# Altium PCB Power.PcbDoc
Units mm, origin at the board's own origin, x right, y up, seen from the top; angles counter-clockwise.
Board outline 70.25 x 40.64 mm, 2 copper layers (Top Layer, Bottom Layer), stack 0.533 mm thick; 68 components, 55 nets, 253 pads, 554 vias.
Unrouted connection lines stored in the file: 53.
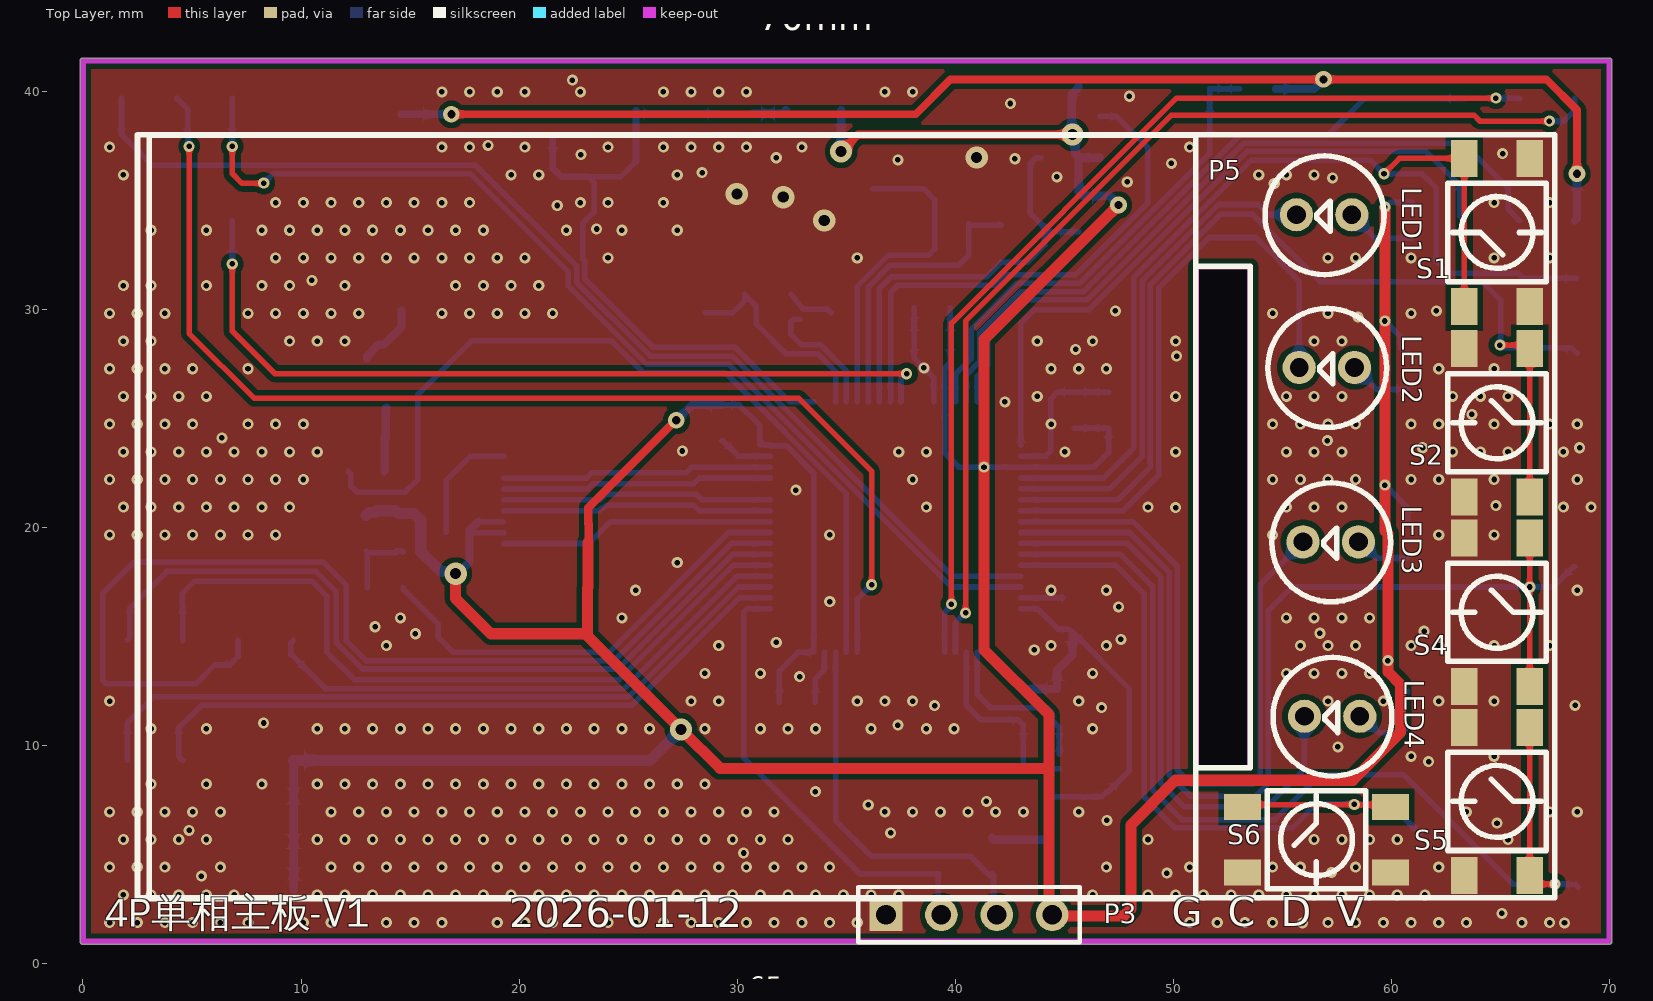
[diagram p0: Top Layer view]
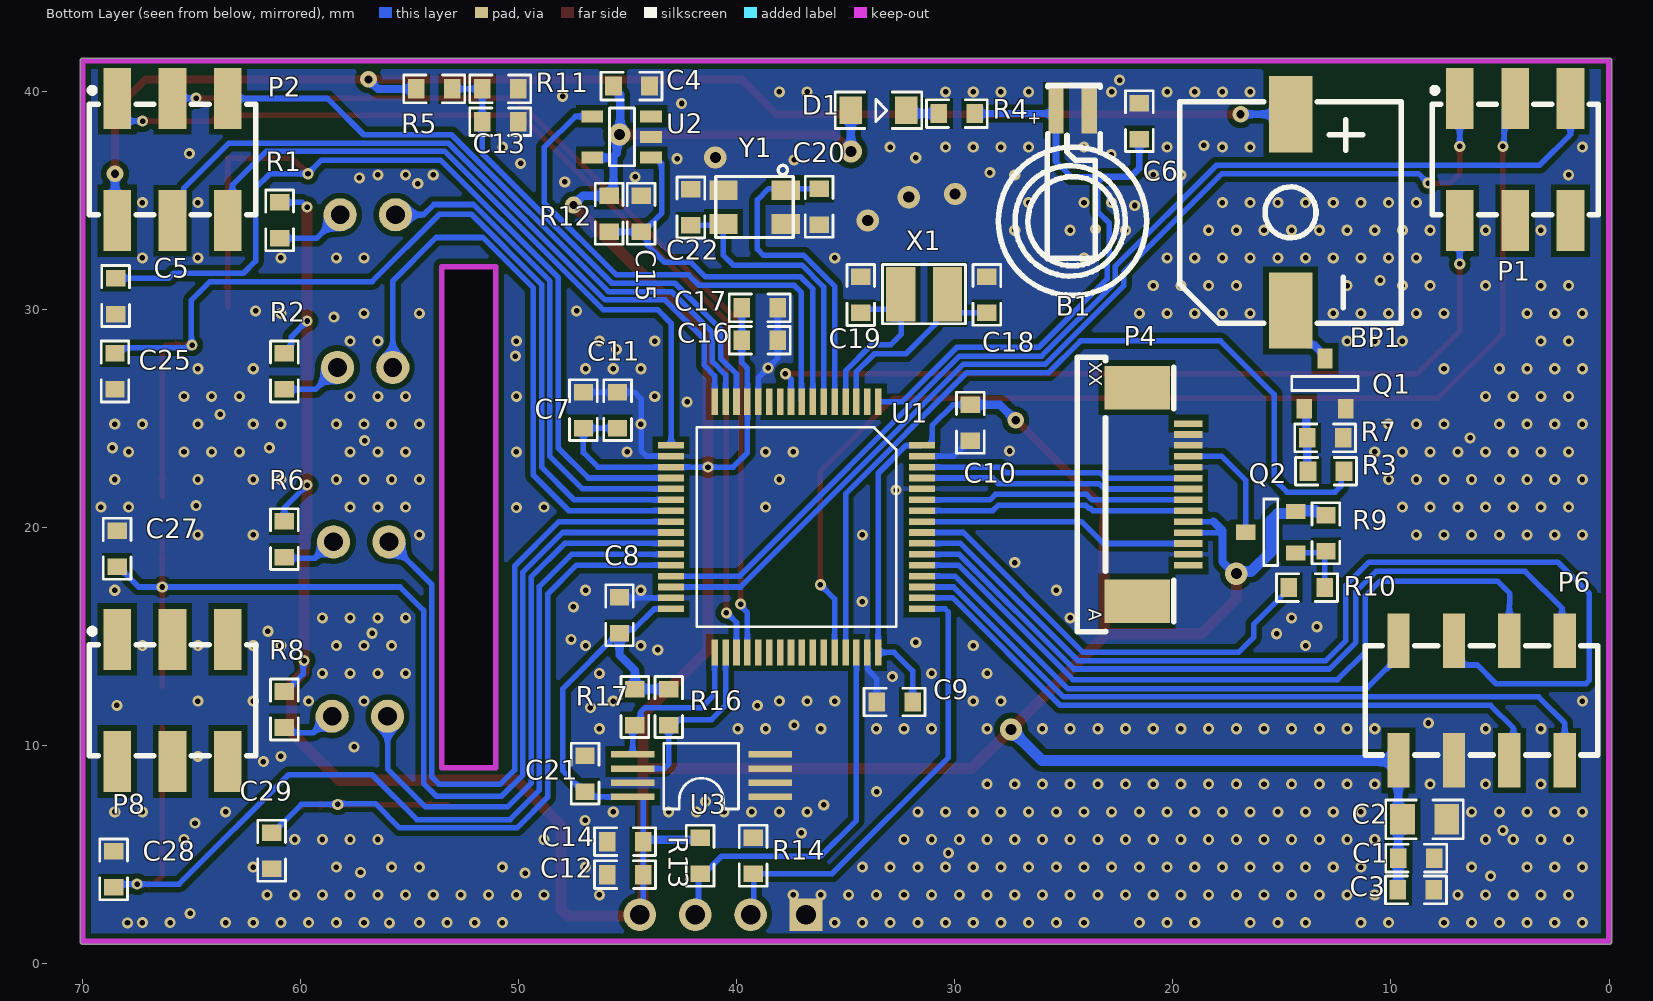
[diagram p1: Bottom Layer view, seen from below]

## Layer stack, top to bottom
Top Solder: solder mask 0.0102, Solder Resist, Dk 3.5
Top Layer: signal copper 0.0356
Dielectric 2: prepreg 0.0711, Composite dielectric, Dk 4.1
Dielectric 1: prepreg 0.32, Composite dielectric, Dk 4.1
Dielectric 3: prepreg 0.0711, Composite dielectric, Dk 4.1
Bottom Layer: signal copper 0.0356
Bottom Solder: solder mask 0.0102, Solder Resist, Dk 3.5

## Board outline
-0.127,1 -0.127,41.348 cw(c-0.007,41.389) -0.007,41.517 69.993,41.517 cw(c69.993,41.389) 70.12,41.389 70.12,1 cw(c69.993,1) 69.99,0.873 cw(c69.986,1) 69.986,0.873 0,0.873 cw(c0,1)
cut-out: 51.051,8.97 51.051,31.953 53.54,31.953 53.54,8.97

## Design rules (kind name [scope] priority, off if disabled: settings)
Clearance "Via to pad" [IsVia vs IsPad] p1: gap=0.254 ignorepadtopadclearanceinfootprint=FALSE
Clearance Ploy [InPoly] p2: gap=0.254 ignorepadtopadclearanceinfootprint=FALSE
Clearance "Track to pad" [IsTrack vs IsPad] p3: gap=0.203 ignorepadtopadclearanceinfootprint=FALSE
Clearance "Track to track" [IsTrack vs IsTrack] p4: gap=0.127 ignorepadtopadclearanceinfootprint=FALSE
Clearance "Via to Track" [IsVia vs IsTrack] p5: gap=0.254 ignorepadtopadclearanceinfootprint=FALSE
Clearance "Via To Via" [IsVia vs IsVia] p6: gap=0.254 ignorepadtopadclearanceinfootprint=FALSE
ComponentClearance [All] p1: gap=0 collisioncheckmode=3 verticalgap=0 showdistances=FALSE
DiffPairsRouting [All] p1: maxlimit=0.254 minlimit=0.178 mostfreqgap=0.178 toplayer_minwidth=0.127 toplayer_maxwidth=2.54 toplayer_prefwidth=0.178 bottomlayer_minwidth=0.127 bottomlayer_maxwidth=2.54 bottomlayer_prefwidth=0.178 maxuncoupledlength=12.7
HoleSize [All] p1: absolutevalues=TRUE maxlimit=5.08 minlimit=0.025 maxpercent=80.000 minpercent=20.000
HoleToHoleClearance [All] p1: gap=0.127 allowstackedmicrovias=TRUE
MinimumSolderMaskSliver [All] p1: minsoldermaskwidth=0
PolygonConnect [All vs (InPadClass('All Pads'))] p1: connectstyle=Direct reliefconductorwidth=0.254 reliefentries=4 polygonreliefangle="90 Angle" airgapwidth=0.254
PolygonConnect GND焊盘 [InNet('GND_1') vs (InPadClass('All Pads'))] p2: connectstyle=Relief reliefconductorwidth=0.254 reliefentries=4 polygonreliefangle="90 Angle" airgapwidth=0.254
PolygonConnect GND过孔 [All vs IsVia] p3: connectstyle=Direct reliefconductorwidth=0.254 reliefentries=4 polygonreliefangle="90 Angle" airgapwidth=0.254
RoutingVias RoutingVias_1 [InNet('AGND_1')] p1: holewidth=0.254 width=0.508 viastyle="Through Hole" minholewidth=0.254 minwidth=0.508 maxholewidth=0.711 maxwidth=1.27
RoutingVias [All] p2: holewidth=0.254 width=0.508 viastyle="Through Hole" minholewidth=0.254 minwidth=0.508 maxholewidth=0.711 maxwidth=1.27
SilkToSilkClearance [All] p1: silktosilkclearance=0
SilkToSolderMaskClearance [IsPad] p1: minsilkscreentomaskgap=0 clearancetoexposedcopper=TRUE
SolderMaskExpansion [All] p1: expansion=0.025 istentingtop=FALSE
Width [All] p1: maxlimit=7.62 minlimit=0.127 preferedwidth=0.178 minimp=50.000000 maximp=50.000000 favimp=50.000000
23 further rules are at their usual default settings.

## Classes and differential pairs
component class Sheet1: BP1 C5 C25 C27 C28 C29 LED1 LED2 LED3 LED4 P4 P5 Q1 Q2 R1 R2 R3 R6 R7 R8 R9 R10 S1 S2 S4 S5 S6
component class MCU: B1 C4 C6 C7 C8 C9 C10 C11 C12 C13 C14 C15 C16 C17 C18 C19 C20 C21 C22 D1 P3 R4 R5 R11 R12 R13 R14 R16 R17 U1 U2 U3 X1 Y1
component class 连接: C1 C2 C3 P1 P2 P6 P8

## Components (designator, comment, footprint, x,y, rotation, side; value= is the part's Value field where it differs from the comment)
B1 "MS621" MS621 34.611,-30.023 r90 bottom
BP1 "BEEP" XHXDZ-SMD9650 14.605,38.938 r90 bottom
C1 "10uF/25V" 0603R 8.014,4.823 r0 bottom
C2 "22uF/10V" 0805R 9.474,6.604 r180 bottom
C3 "104/10V" 0603R 8.029,3.368 r0 bottom
C4 "104" 0603R 44.006,40.234 r0 bottom
C5 "104" 0603R 68.491,31.426 r270 bottom
C6 "0.1uF/10V/0603" 0603R 21.54,39.45 r270 bottom
C7 "0.1uF" 0603R 47.033,26.195 r270 bottom
C8 "0.1uF" 0603R 45.381,16.787 r270 bottom
C9 "0.1uF" 0603R 33.59,11.985 r180 bottom
C10 "0.1uF" 0603R 29.287,23.964 r90 bottom
C11 "4.7uF/10V/0603" 0603R 45.47,26.195 r270 bottom
C12 "10nF/10V/0603" 0603R 45.95,4.07 r180 bottom
C13 "104" 0603R 50.023,38.597 r0 bottom
C14 "1uF/10V/0603" 0603R 45.95,5.578 r180 bottom
C15 "0.1uF/10V/0603" 0603R 44.387,35.198 r270 bottom
C16 "10nF/10V/0603" 0603R 38.12,28.574 r0 bottom
C17 "1uF/10V/0603" 0603R 38.12,30.057 r0 bottom
C18 "10pF" 0603r 28.531,29.829 r90 bottom
C19 "10pF" 0603r 34.316,31.478 r270 bottom
C20 "20pF" 0603r 36.225,33.874 r90 bottom
C21 "0.1uF" 0603R 46.961,9.523 r270 bottom
C22 "20pF" 0603r 42.105,35.492 r270 bottom
C25 "104" 0603R 68.517,27.97 r270 bottom
C27 "104" 0603R 68.42,18.185 r90 bottom
C28 "104" 0603R 68.579,3.482 r90 bottom
C29 "104" 0603R 61.335,5.985 r270 bottom
D1 "SS14" SOD323 32.233,39.12 r180 bottom
LED1 "LED" LED 56.921,34.33 r180 top locked
LED2 "LED" Led 57.049,27.33 r180 top
LED3 "LED" led 57.223,19.33 r180 top
LED4 "LED" led 57.286,11.33 r180 top
P1 "Header 3X2" CONN-SMD_5BME8-08872-203-W0 4.306,36.862 r180 bottom locked
P2 "Header 3X2" CONN-SMD_5BME8-08872-203-W0 65.88,36.862 r180 bottom locked
P3 "Header 4" HDR1X4 36.829,2.23 r0 top
P4 "Header 14" 0.5mm间距FPC排座上接14pin 20.467,21.503 r270 bottom
P5 "TFT 2.0" 2.0寸TFT彩屏 51.042,37.967 r180 top locked
P6 "Header 4X2" CONN-SMD_5BME8-08872-204-W0 5.84,12.054 r180 bottom locked
P8 "Header 3X2" CONN-SMD_5BME8-08872-203-W0 65.88,12.054 r180 bottom locked
Q1 "S8050" SOT-23 13.975,25.44 r180 bottom
Q2 "AO3401" SOT-23 14.366,18.819 r90 bottom
R1 "Res2" 0603R 60.971,34.897 r270 bottom value=1K
R2 "Res2" 0603R 60.747,27.971 r270 bottom value=1K
R3 "4.7K/5%" 0603R 12.156,22.567 r0 bottom
R4 "470R/5%" 0603R 29.083,38.972 r0 bottom
R5 "9K/1%/0603" 0603R 54.703,40.101 r180 bottom
R6 "Res2" 0603R 60.747,20.28 r270 bottom value=1K
R7 "47K/5%" 0603R 13.843,24.101 r180 bottom
R8 "Res2" 0603R 60.747,12.466 r270 bottom value=1K
R9 "47K/5%/0603" 0603R 12.981,18.895 r90 bottom
R10 "4.7K/5%/0603" 0603R 13.028,17.235 r0 bottom
R11 "3K/1%/0603" 0603R 50.023,40.101 r0 bottom
R12 "10K/5%/0603" 0603r 45.854,33.547 r90 bottom
R13 "10K/5%/0603" 0603r 41.686,4.108 r90 bottom
R14 "10K/5%/0603" 0603r 39.251,5.759 r270 bottom
R16 "4.7K/5%/0603" 0603R 43.121,12.577 r270 bottom
R17 "4.7K/5%/0603" 0603R 44.673,12.577 r270 bottom
S1 "SW2" 4.5*4.5贴片4脚独立按键 64.849,33.517 r270 top
S2 "SW2" 4.5*4.5贴片4脚独立按键 64.849,24.788 r90 top
S4 "SW2" 4.5*4.5贴片4脚独立按键 64.849,16.097 r90 top
S5 "SW2" 4.5*4.5贴片4脚独立按键 64.849,7.423 r90 top
S6 "SW2" 4.5*4.5贴片4脚独立按键 56.569,5.671 r180 top
U1 "*" LQFP64 33.515,25.758 r270 bottom
U2 "CAT823ZTDI-GT3" SOT-23-5 43.93,36.946 r90 bottom
U3 "BL24C16A-SFRC" TSSOP8 38.476,7.631 r0 bottom
X1 "32.768K" Y3215 31.414,30.678 r180 bottom
Y1 "8MHz无源" 3225 39.189,34.684 r180 bottom

## Footprints (in the part's own frame and the unit in brackets; to place one, negate y for a bottom-side part, rotate by r counter-clockwise, add the part's x,y. Pads: shape width x height; smd on the part's side, far side on the other; paste and mask are expansions set on the pad)
0.5mm间距FPC排座上接14pin [mm]
  rect 0.3x1.3 smd paste+0.051: 1(-3.25,1.175) 2(-2.75,1.175) 3(-2.25,1.175) 4(-1.75,1.175) 5(-1.25,1.175) 6(-0.75,1.175) 7(-0.25,1.175) 8(0.25,1.175) 9(0.75,1.175) 10(1.25,1.175) 11(1.75,1.175) 12(2.25,1.175) 13(2.75,1.175) 14(3.25,1.175)
  rect 2x3 smd paste+0.051: 15(4.9,-1.175) 16(-4.9,-1.175)
  silkscreen extent -6.3,-3.92 6.3,0.51
2.0寸TFT彩屏 [mm]
  Keep-Out Layer lines w0.254: -0.009,28.997 -2.499,28.997 -2.499,6.014 -0.009,6.014 -0.009,28.997
  silkscreen extent -2.5,0 48,35
4.5*4.5贴片4脚独立按键 [mm]
  rect 1.7x1.2 smd: 1(-3.4,-1.5) 1(3.4,-1.5) 2(-3.4,1.5) 2(3.4,1.5)
  silkscreen extent -2.25,-2.25 2.25,2.25
0603R [mil]
  rect 30x35 smd: 1(0,0) 2(65,0)
  silkscreen extent -22,-25 88,25
0603r [mil]
  rect 30x35 smd: 1(0,0) 2(65,0)
  silkscreen extent -22,-25 88,25
0805R [mil]
  rect 45x55 smd: 1(0,0) 2(80,0)
  silkscreen extent -30,-35 110,35
3225 [mm]
  rect 1.3x0.9 smd: 1(1.425,0.775) 2(-1.425,0.775) 3(-1.425,-0.775) 4(1.425,-0.775)
  silkscreen extent -1.78,-1.4 1.78,1.91, body extent -1.65,-1.3 1.55,1.2, height 0.61
CONN-SMD_5BME8-08872-203-W0 [mm]
  rect 1.27x2.8 smd paste+0.051: 1(-2.54,2.8) 2(-2.54,-2.8) 3(0,2.8) 4(0,-2.8) 5(2.54,2.8) 6(2.54,-2.8)
  silkscreen extent -3.81,-2.54 3.81,3.3
CONN-SMD_5BME8-08872-204-W0 [mm]
  rect 1.02x2.5 smd paste+0 mask+0.05: 1(-3.81,2.75) 2(-3.81,-2.75) 3(-1.27,2.75) 4(-1.27,-2.75) 5(1.27,2.75) 6(1.27,-2.75) 7(3.81,2.75) 8(3.81,-2.75)
  silkscreen extent -5.33,-2.5 5.33,2.5
HDR1X4 [mm] "Connector; Header; 4 Position"
  rect 1.5x1.5 hole 0.9: 1(0,0)
  round 1.5 hole 0.9: 2(2.54,0) 3(5.08,0) 4(7.62,0)
  silkscreen extent -1.27,-1.27 8.89,1.27
LED [mil]
  round 60 hole 34: 1(-50,0) 2(50,0)
  silkscreen extent -108,-106 107,108
Led [mil]
  round 60 hole 34: 1(-50,0) 2(50,0)
  silkscreen extent -108,-106 107,108
led [mil]
  round 60 hole 34: 1(-50,0) 2(50,0)
  silkscreen extent -108,-106 107,108
LQFP64 [mm]
  rect 1.2x0.3 smd: 1(0,0) 2(0,-0.5) 3(0,-1) 4(0,-1.5) 5(0,-2) 6(0,-2.5) 7(0,-3) 8(0,-3.5) 9(0,-4) 10(0,-4.5) 11(0,-5) 12(0,-5.5) 13(0,-6) 14(0,-6.5) 15(0,-7) 16(0,-7.5) 33(11.5,-7.5) 34(11.5,-7) 35(11.5,-6.5) 36(11.5,-6) 37(11.5,-5.5) 38(11.5,-5) 39(11.5,-4.5) 40(11.5,-4) 41(11.5,-3.5) 42(11.5,-3) 43(11.5,-2.5) 44(11.5,-2) 45(11.5,-1.5) 46(11.5,-1) 47(11.5,-0.5) 48(11.5,0)
  rect 0.3x1.2 smd: 17(2,-9.5) 18(2.5,-9.5) 19(3,-9.5) 20(3.5,-9.5) 21(4,-9.5) 22(4.5,-9.5) 23(5,-9.5) 24(5.5,-9.5) 25(6,-9.5) 26(6.5,-9.5) 27(7,-9.5) 28(7.5,-9.5) 29(8,-9.5) 30(8.5,-9.5) 31(9,-9.5) 32(9.5,-9.5) 49(9.5,2) 50(9,2) 51(8.5,2) 52(8,2) 53(7.5,2) 54(7,2) 55(6.5,2) 56(6,2) 57(5.5,2) 58(5,2) 59(4.5,2) 60(4,2) 61(3.5,2) 62(3,2) 63(2.5,2) 64(2,2)
  silkscreen extent 1.18,-8.32 10.32,0.82
MS621 [mm]
  rect 2.1x0.7 smd paste+0 mask+0.05: 1(69.139,-9.246) 2(69.139,-10.77)
  silkscreen extent 60.66,-13.41 70.28,-6.61
SOD323 [mil]
  rect 40x50 smd: 1(0,0) 2(-100,0)
  silkscreen extent -128,-33 28,33
SOT-23 [mm]
  rect 0.7x0.9 smd: 1(0,0) 2(1.9,0) 3(0.95,2.3)
  silkscreen extent -0.57,0.82 2.47,1.47
SOT-23-5 [mm]
  rect 0.55x1 smd: 1(0,0) 2(0.95,0) 3(1.9,0) 4(1.9,2.7) 5(0,2.7)
  silkscreen extent -0.37,0.76 2.29,1.91
TSSOP8 [mm]
  rect 2x0.3 smd: 1(0,0) 2(0,-0.65) 3(0,-1.3) 4(0,-1.95) 5(6.299,-1.95) 6(6.299,-1.3) 7(6.299,-0.65) 8(6.299,0)
  silkscreen extent 1.45,-2.46 4.88,0.56
XHXDZ-SMD9650 [mm]
  rect 3.5x2 smd: 1(0,0) 2(-9.001,0)
  silkscreen extent -9.58,-5.08 0.58,5.08
Y3215 [mm]
  rect 1.35x2.5 smd: 1(-1.075,0) 2(1.075,0)
  silkscreen extent -1.9,-1.35 1.9,1.37

## Part data
B1: library part BATTERY
C1 C4 C5 C13 C18 C19 C20 C22 C25 C27 C28 C29: library part CAP
C2: library part "Cap Pol1", "Polarized Capacitor (Radial)", LatestRevisionDate=17-Jul-2002, LatestRevisionNote="Re-released for DXP Platform.", PackageDescription="Polarized Capacitor (Radial); 2 Leads", PackageReference=RB7.6-15, Published=8-Jun-2000, Publisher="Altium Limited"
C3 C6 C7 C8 C9 C10 C11 C12 C14 C15 C16 C17 C21: library part CAP_1
D1: library part DIODE
P1 P2 P8: "Header, 3-Pin, Dual row", LatestRevisionDate=17-Jul-2002, LatestRevisionNote="Re-released for DXP Platform.", Publisher="Altium Limited"
P3: "Header, 4-Pin", LatestRevisionDate=17-Jul-2002, LatestRevisionNote="Re-released for DXP Platform.", Publisher="Altium Limited"
P4: "Header, 14-Pin", LatestRevisionDate=17-Jul-2002, LatestRevisionNote="Re-released for DXP Platform.", Publisher="Altium Limited"
P5: library part "Header 14", LatestRevisionDate=17-Jul-2002, LatestRevisionNote="Re-released for DXP Platform.", Publisher="Altium Limited"
P6: "Header, 4-Pin, Dual row", LatestRevisionDate=17-Jul-2002, LatestRevisionNote="Re-released for DXP Platform.", Publisher="Altium Limited"
Q1: library part NPN_1
Q2: library part PNP
R3 R7: library part Res2, "Resistor", LatestRevisionDate=17-Jul-2002, LatestRevisionNote="Re-released for DXP Platform.", PackageDescription="Axial Device, Thru-Hole; 2 Leads; 0.4 in Pin Spacing", PackageReference=AXIAL-0.4, Published=8-Jun-2000, Publisher="Altium Limited"
R4 R5 R9 R10 R11 R12 R13 R14 R16 R17: library part RES
U1: library part N32G452REL7, Symbol=N32G452REL7
U2: library part CAT823
U3: library part 24LC02
X1: library part XTAL
Y1: library part 12MHz无源
R1 R2 R6 R8: LatestRevisionDate=17-Jul-2002, LatestRevisionNote="Re-released for DXP Platform.", PackageDescription="Axial Device, Thru-Hole; 2 Leads; 0.4 in Pin Spacing", PackageReference=AXIAL-0.4, Published=8-Jun-2000, Publisher="Altium Limited"

## Via types
v1: diameter 0.508, hole 0.254, Top Layer to Bottom Layer, 541 vias
v2: diameter 1.016, hole 0.508, Top Layer to Bottom Layer, 8 vias
v3: diameter 0.762, hole 0.381, Top Layer to Bottom Layer, 5 vias

## Nets (pads, with @x,y where several pads share a name; then routed paths per layer and width w, separated by ;. In a path a pad name is that pad's centre, name@x,y a point inside that pad or via, vN(x,y) a via of type N, cw(c..) or ccw(c..) an arc to the next point about the centre after c; other vN are vias at no path point)
4G_MCU_RXD: P6.1 U1.52 | length 25.5
  Bottom Layer w0.254: P6.1 9.525,14.679 9.525,14.154 9.56,14.154 11.117,12.597 24.833,12.597 29.995,17.758 U1.52
4G_MCU_TXD: P6.8 U1.51 | length 33.8
  Bottom Layer w0.254: P6.8 2.03,11.021 3.224,12.216 25.014,12.216 30.057,17.258 U1.51
4G_Reset: P6.6 U1.50 | length 31.2
  Bottom Layer w0.254: P6.6 4.385,9.489 4.385,10.786 5.429,11.83 25.168,11.83 30.095,16.758 U1.50
BEEP: R3.1 U1.45 | length 38.9
  Bottom Layer w0.254: R3.1 12.285,22.438 12.285,21.891 12.565,21.611 14.777,21.611 15.355,22.189 15.355,26.09 17.812,28.547 24.238,28.547 25.702,27.083 29.464,27.083 35.015,21.532 U1.45
BL0942_MCU_RXD: P2.6 U1.17 | length 31.3
  Bottom Layer w0.254: U1.17 43.015,29.356 43.625,29.965 46.121,29.965 53.392,37.236 61.588,37.236 63.131,35.694 63.131,34.271 P2.6
BL0942_MCU_TXD: P2.4 U1.16 | length 33.2
  Bottom Layer w0.254: U1.16 41.015,26.945 41.504,27.433 41.504,28.642 43.287,30.426 46.042,30.426 53.234,37.617 63.295,37.617 65.372,35.541 65.372,34.57 P2.4
Dog_WDI: U1.8 U2.4 | length 23.9
  Bottom Layer w0.254: U1.8 37.035,25.778 37.035,30.757 37.376,31.098 41.74,31.098 42.21,31.569 45.524,31.569 48.836,34.881 48.836,37.418 47.408,38.846 U2.4
ERPOM_SCL: R16.2 U1.34 U3.6 | length 8.9
  Bottom Layer w0.254: U1.34 40.515,11.827 41.161,11.18 42.867,11.18 R16.2 43.121,9.148 43.338,8.931 U3.6
ERPOM_SDA: R17.2 U1.33 U3.5 | length 7.8
  Bottom Layer w0.254: U1.33 41.015,12.324 41.61,11.729 44.204,11.729 44.411,11.521 44.411,11.18 44.665,10.926 R17.2 44.775,10.824 U3.5
GND: B1.2 C1.1 C2.2 C3.1 C4.1 C5.2 C6.1 C7.1 C8.1 C9.1 C10.1 C11.1 C12.1 C13.1 C14.1 C15.1 C16.1 C17.1 C18.2 C19.1 C20.1 C21.1 C22.1 C25.2 C27.2 C28.2 C29.2 P3.1 P4.2 P4.3 P4.5 P4.13 P6.4 Q1.2 R7.2 R11.1 R14.1 S1.2 S2.2 S4.2 S5.2 S6.2 U1.12 U1.18 U1.31 U1.47 U1.60 U1.63 U2.2 U3.1 U3.2 U3.3 U3.4 U3.7 Y1.2 Y1.4 | length 18.2
  Bottom Layer w0.254: C10.1 29.351,23.964 30.057,23.258 U1.63 ; C9.1 33.59,13.06 33.995,13.466 33.995,14.238 U1.47 ; C17.1 C16.1 38.12,27.754 39.015,26.859 U1.12 ; U1.31 C8.1@44.943,16.758 ; U1.18 44.15,23.258 44.387,23.495 44.387,25.881 44.701,26.195 C11.1 C7.1
  other v1: 55.931,1.854 67.944,1.854 1.218,1.868 2.488,1.868 3.758,1.868 5.028,1.868 6.298,1.868 7.568,1.868 10.108,1.868 11.378,1.868 13.918,1.868 15.188,1.868 16.458,1.868 18.998,1.868 20.268,1.868 21.538,1.868 24.078,1.868 25.348,1.868 26.618,1.868 27.888,1.868 29.158,1.868 30.428,1.868 31.698,1.868 32.968,1.868 34.238,1.868 35.508,1.868 50.748,1.868 52.018,1.868 53.288,1.868 54.558,1.868 57.098,1.868 58.368,1.868 59.638,1.868 60.908,1.868 62.178,1.868 63.448,1.868 65.988,1.868 67.258,1.868 65.075,2.286 1.853,3.138 3.123,3.138 4.393,3.138 5.663,3.138 6.933,3.138 10.743,3.138 12.013,3.138 13.283,3.138 14.553,3.138 15.823,3.138 17.093,3.138 18.363,3.138 19.633,3.138 20.903,3.138 22.173,3.138 23.443,3.138 24.713,3.138 25.983,3.138 27.253,3.138 28.523,3.138 29.793,3.138 31.063,3.138 32.333,3.138 33.603,3.138 34.873,3.138 36.143,3.138 37.413,3.138 46.303,3.138 48.843,3.138 50.113,3.138 51.383,3.138 52.653,3.138 53.923,3.138 55.193,3.138 56.463,3.138 57.733,3.138 59.003,3.138 60.273,3.138 61.543,3.138 5.429,4.003 49.709,4.135 57.259,4.171 1.218,4.408 2.488,4.408 3.758,4.408 6.298,4.408 11.378,4.408 12.648,4.408 13.918,4.408 15.188,4.408 16.458,4.408 17.728,4.408 18.998,4.408 20.268,4.408 21.538,4.408 22.808,4.408 24.078,4.408 25.348,4.408 26.618,4.408 27.888,4.408 29.158,4.408 30.428,4.408 31.698,4.408 32.968,4.408 34.238,4.408 46.938,4.408 50.748,4.408 54.558,4.408 55.828,4.408 58.368,4.408 62.178,4.408 30.297,5.059 1.853,5.678 3.123,5.678 4.393,5.678 5.663,5.678 10.743,5.678 12.013,5.678 13.283,5.678 14.553,5.678 15.823,5.678 17.093,5.678 18.363,5.678 19.633,5.678 20.903,5.678 22.173,5.678 23.443,5.678 24.713,5.678 25.983,5.678 27.253,5.678 28.523,5.678 29.793,5.678 31.063,5.678 32.333,5.678 48.843,5.678 56.463,5.678 57.733,5.678 59.003,5.678 60.273,5.678 65.353,5.678 37.035,5.985 4.87,6.1 64.849,6.433 46.956,6.557 1.218,6.948 2.488,6.948 3.758,6.948 5.028,6.948 6.298,6.948 11.378,6.948 12.648,6.948 13.918,6.948 15.188,6.948 16.458,6.948 17.728,6.948 18.998,6.948 20.268,6.948 21.538,6.948 22.808,6.948 24.078,6.948 25.348,6.948 26.618,6.948 27.888,6.948 29.158,6.948 30.428,6.948 31.698,6.948 36.778,6.948 38.048,6.948 39.318,6.948 40.588,6.948 41.858,6.948 43.128,6.948 45.668,6.948 63.448,6.948 67.258,6.948 68.528,6.948 36.015,7.265 41.433,7.423 33.59,7.872 3.123,8.218 5.663,8.218 8.203,8.218 10.743,8.218 12.013,8.218 13.283,8.218 14.553,8.218 15.823,8.218 17.093,8.218 18.363,8.218 19.633,8.218 20.903,8.218 22.173,8.218 23.443,8.218 24.713,8.218 25.983,8.218 27.253,8.218 28.523,8.218 61.713,9.254 60.908,9.488 64.718,9.488 57.556,9.923 3.123,10.758 5.663,10.758 10.743,10.758 12.013,10.758 13.283,10.758 14.553,10.758 15.823,10.758 17.093,10.758 18.363,10.758 19.633,10.758 20.903,10.758 22.173,10.758 23.443,10.758 24.713,10.758 25.983,10.758 28.523,10.758 31.063,10.758 32.333,10.758 33.603,10.758 36.143,10.758 38.683,10.758 39.953,10.758 46.303,10.758 37.376,10.926 8.283,11.021 46.72,11.729 39.059,11.819 68.431,11.83 1.218,12.028 27.888,12.028 29.158,12.028 35.508,12.028 36.778,12.028 38.048,12.028 45.668,12.028 57.098,12.028 59.638,12.028 62.178,12.028 64.718,12.028 32.868,13.149 28.523,13.298 31.063,13.298 46.303,13.298 55.193,13.298 56.463,13.298 57.733,13.298 59.003,13.298 43.625,14.376 13.918,14.568 29.158,14.568 44.398,14.568 46.938,14.568 55.828,14.568 57.098,14.568 58.368,14.568 60.908,14.568 62.178,14.568 64.718,14.568 67.258,14.568 31.795,14.717 47.596,14.854 15.24,15.113 56.724,15.136 61.508,15.229 13.4,15.436 14.553,15.838 24.713,15.838 55.193,15.838 56.463,15.838 57.733,15.838 59.003,15.838 47.492,16.343 34.247,16.585 25.348,17.108 44.398,17.108 46.938,17.108 68.528,17.108 27.253,18.378 1.218,19.648 2.488,19.648 3.758,19.648 5.028,19.648 6.298,19.648 7.568,19.648 8.838,19.648 34.238,19.648 54.558,19.648 62.178,19.648 64.718,19.648 50.111,20.903 1.853,20.918 3.123,20.918 4.393,20.918 5.663,20.918 6.933,20.918 8.203,20.918 9.473,20.918 38.683,20.918 48.843,20.918 55.193,20.918 56.463,20.918 57.733,20.918 67.893,20.918 69.163,20.918 64.793,20.995 32.693,21.698 1.218,22.188 2.488,22.188 3.758,22.188 5.028,22.188 6.298,22.188 7.568,22.188 8.838,22.188 10.108,22.188 38.048,22.188 54.558,22.188 55.828,22.188 57.098,22.188 58.368,22.188 60.908,22.188 62.178,22.188 64.718,22.188 68.528,22.188 1.853,23.458 3.123,23.458 4.393,23.458 5.663,23.458 6.933,23.458 8.203,23.458 9.473,23.458 10.743,23.458 37.413,23.458 38.683,23.458 45.033,23.458 50.113,23.458 55.193,23.458 56.463,23.458 57.733,23.458 62.813,23.458 64.083,23.458 65.353,23.458 67.893,23.458 27.486,23.495 61.441,23.643 68.642,23.643 57.069,23.973 6.369,24.101 1.218,24.728 2.488,24.728 3.758,24.728 5.028,24.728 7.568,24.728 8.838,24.728 10.108,24.728 44.398,24.728 54.558,24.728 55.828,24.728 57.098,24.728 58.368,24.728 60.908,24.728 62.178,24.728 64.718,24.728 67.258,24.728 68.528,24.728 63.699,25.171 42.276,25.749 1.853,25.998 3.123,25.998 4.393,25.998 5.663,25.998 43.763,25.998 50.113,25.998 55.193,25.998 56.463,25.998 57.733,25.998 62.813,25.998 64.083,25.998 65.353,25.998 1.218,27.268 2.488,27.268 3.758,27.268 5.028,27.268 7.568,27.268 44.398,27.268 45.668,27.268 46.938,27.268 62.178,27.268 64.718,27.268 38.568,27.306 50.158,27.848 45.524,28.154 1.853,28.538 3.123,28.538 9.473,28.538 10.743,28.538 12.013,28.538 43.763,28.538 46.303,28.538 50.113,28.538 56.463,28.538 57.733,28.538 58.482,29.636 1.218,29.808 2.488,29.808 3.758,29.808 7.568,29.808 8.838,29.808 10.108,29.808 11.378,29.808 12.648,29.808 16.458,29.808 17.728,29.808 18.998,29.808 20.268,29.808 21.538,29.808 54.558,29.808 57.098,29.808 60.908,29.808 47.349,29.918 62.07,29.918 1.853,31.078 3.123,31.078 5.663,31.078 8.203,31.078 9.473,31.078 12.013,31.078 17.093,31.078 18.363,31.078 19.633,31.078 20.903,31.078 10.499,31.321 8.838,32.348 10.108,32.348 11.378,32.348 12.648,32.348 13.918,32.348 15.188,32.348 16.458,32.348 17.728,32.348 18.998,32.348 20.268,32.348 24.078,32.348 35.508,32.348 57.098,32.348 58.368,32.348 60.908,32.348 64.718,32.348 67.258,32.348 3.123,33.618 5.663,33.618 8.203,33.618 9.473,33.618 10.743,33.618 12.013,33.618 13.283,33.618 14.553,33.618 15.823,33.618 17.093,33.618 18.363,33.618 22.173,33.618 24.713,33.618 27.253,33.618 23.552,33.678 21.75,34.754 8.838,34.888 10.108,34.888 11.378,34.888 12.648,34.888 13.918,34.888 15.188,34.888 16.458,34.888 17.728,34.888 22.808,34.888 24.078,34.888 26.618,34.888 64.718,34.888 67.258,34.888 54.634,35.757 47.892,35.835 57.306,36.017 44.665,36.068 1.853,36.158 19.633,36.158 20.903,36.158 27.253,36.158 53.923,36.158 55.193,36.158 56.463,36.158 28.39,36.265 49.918,36.683 37.376,36.849 42.74,36.897 31.795,36.946 22.835,37.09 65.103,37.135 1.218,37.428 16.458,37.428 17.728,37.428 20.268,37.428 24.078,37.428 26.618,37.428 27.888,37.428 29.158,37.428 30.428,37.428 32.968,37.428 50.748,37.428 18.581,37.507 42.534,39.433 47.992,39.766 16.458,39.968 17.728,39.968 18.998,39.968 20.268,39.968 22.808,39.968 26.618,39.968 27.888,39.968 29.158,39.968 30.428,39.968 36.778,39.968 38.048,39.968 22.447,40.502
  other v2: 33.995,34.06 32.114,35.135 29.986,35.277 40.986,36.962
Key_button1: C5.1 S1.1 U1.20 | length 51.1
  Top Layer w0.254: v1(59.667,36.211) 60.374,36.917 63.349,36.917 S1.1@63.349,30.117
  Bottom Layer w0.254: U1.20 46.804,22.258 48.189,23.643 48.189,31.443 53.582,36.836 59.041,36.836 v1(59.667,36.211) 61.414,36.211 62.07,35.555 62.07,32.204 62.625,31.648 65.825,31.648 66.047,31.426 C5.1
Key_button2: C25.1 S2.1 U1.22 | length 47.7
  Top Layer w0.254: v1(64.977,28.355) 66.182,28.355 66.349,28.188 S2.1@66.349,21.388
  Bottom Layer w0.254: U1.22 47.457,21.258 48.951,22.752 48.951,31.127 52.177,34.354 53.637,34.354 56.724,31.267 64.164,31.267 65.014,30.417 65.014,28.392 v1(64.977,28.355) ; v1@65.177,28.224 68.263,28.224 C25.1
Key_button3: C27.1 S4.1 U1.25 | length 51.7
  Top Layer w0.254: S4.1@66.349,12.697 v1(66.349,17.258) S4.1@66.349,19.497
  Bottom Layer w0.254: U1.25 47.992,19.758 49.813,17.937 49.813,8.639 50.781,7.671 53.785,7.671 54.366,8.252 54.366,16.181 55.443,17.258 v1(66.349,17.258) 67.43,17.258 68.356,18.185 C27.1
Key_button4: C28.1 S5.1 U1.27 | length 47.2
  Top Layer w0.254: S5.1@66.349,10.823 66.349,4.023 66.743,3.63 v1(67.5,3.63)
  Bottom Layer w0.254: U1.27 47.577,18.758 49.051,17.284 49.051,7.939 50.396,6.594 54.67,6.594 56.719,8.643 60.098,8.643 60.112,8.657 60.549,8.657 65.576,3.63 v1(67.5,3.63) 68.431,3.63 C28.1
Key_switch: C29.1 S6.1 U1.28 | length 36.7
  Top Layer w0.254: S6.1@53.169,7.171 53.275,7.277 v1@58.287,7.277 ; v1(58.301,7.29) 58.326,7.265 59.875,7.265 S6.1@59.969,7.171
  Bottom Layer w0.254: U1.28 47.349,18.258 48.67,16.936 48.67,7.619 50.076,6.213 55.461,6.213 56.569,7.322 58.269,7.322 v1(58.301,7.29) 59.967,7.29 61.272,5.985 C29.1
LCD_CS: P4.12 U1.57 | length 12.6
  Bottom Layer w0.254: P4.12 23.188,19.253 24.193,20.258 U1.57
LCD_D/C: P4.7 U1.61 | length 12.4
  Bottom Layer w0.254: P4.7 23.139,21.753 23.389,22.003 28.009,22.003 28.265,22.258 U1.61
LCD_Light: R10.2 U1.56 | length 20.7
  Bottom Layer w0.254: R10.2 14.679,17.171 16.303,15.547 16.303,14.944 16.987,14.26 24.115,14.26 29.612,19.758 U1.56
LCD_RESET: P4.6 U1.62 | length 12.4
  Bottom Layer w0.254: P4.6 23.1,22.253 23.35,22.503 27.673,22.503 27.928,22.758 U1.62
LCD_SCL: P4.9 U1.58 | length 12.4
  Bottom Layer w0.254: P4.9 19.304,20.765 23.68,20.765 23.787,20.872 23.867,20.872 23.998,21.003 28.019,21.003 28.263,20.758 U1.58
LCD_SDA: P4.8 U1.59 | length 12.4
  Bottom Layer w0.254: P4.8 23.709,21.253 23.959,21.503 28.145,21.503 28.39,21.258 U1.59
LED_Alarm: LED3.2 U1.24 | length 33.2
  Bottom Layer w0.254: U1.24 48.147,20.258 50.194,18.211 50.194,8.861 50.84,8.215 53.661,8.215 53.985,8.539 53.985,17.362 LED3.2
LED_Button: LED4.2 U1.26 | length 26.7
  Bottom Layer w0.254: U1.26 47.892,19.258 49.432,17.718 49.432,8.251 50.512,7.171 54.285,7.171 56.016,8.902 LED4.2
LED_Net: LED2.2 U1.23 | length 27.8
  Bottom Layer w0.254: U1.23 47.708,20.758 49.332,22.382 49.332,30.97 51.65,33.288 53.788,33.288 55.779,31.297 LED2.2
LED_RUN: LED1.2 U1.21 | length 22.9
  Bottom Layer w0.254: U1.21 47.077,21.758 48.57,23.251 48.57,31.285 52.086,34.801 53.895,34.801 54.366,34.33 LED1.2
Lora_MCU_RXD: P6.7 U1.54 | length 37
  Bottom Layer w0.254: P6.7@2.021,14.813 2.151,14.944 2.151,16.286 3.844,17.979 10.679,17.979 11.608,17.05 11.608,14.717 12.827,13.498 24.538,13.498 29.798,18.758 U1.54
Lora_MCU_TXD: P6.5 U1.53 | length 34.9
  Bottom Layer w0.254: P6.5 4.57,16.435 4.548,16.457 4.548,16.958 5.114,17.524 10.499,17.524 11.17,16.853 11.17,14.287 12.444,13.013 24.592,13.013 29.837,18.258 U1.53
Lora_Reset: P6.3 U1.55 | length 48.3
  Bottom Layer w0.254: P6.3 7.11,14.064 6.727,13.681 6.04,13.681 5.18,12.821 1.065,12.821 0.9,12.986 0.9,16.951 2.352,18.403 11.004,18.403 12.065,17.342 12.065,14.799 12.985,13.879 24.364,13.879 29.743,19.258 U1.55
LoseCurrent: P1.2 U1.9 | length 38.2
  Top Layer w0.254: v1(6.846,32.073) 6.846,28.997 8.805,27.038 v1(37.775,27.038)
  Bottom Layer w0.254: v1(6.846,32.073) P1.2 ; U1.9 37.515,26.778 v1(37.775,27.038)
LosePowerCheck: C13.2 R5.2 R11.2 U1.14 | length 22.2
  Bottom Layer w0.254: U1.14 40.015,27.022 40.742,27.749 40.742,29.086 42.843,31.188 45.727,31.188 51.674,37.135 R11.2 R5.2
MCU_BL0942_Control: P2.5 U1.15 | length 30.1
  Bottom Layer w0.254: U1.15 40.515,26.983 41.123,27.591 41.123,28.929 43.001,30.807 45.884,30.807 53.078,38 57.111,38 58.773,39.662 P2.5
MCU_RESET: C15.2 R12.1 U1.7 U2.1 | length 19.7
  Bottom Layer w0.254: U1.7 36.515,30.93 37.068,31.483 41.433,31.483 42.095,32.145 43.307,32.145 44.096,32.934 44.096,33.479 44.164,33.547 R12.1@45.677,33.547 ; U2.1 43.705,36.946 43.448,36.688 43.448,34.395 C15.2@44.23,33.613
NetBP1_2: BP1.2 Q1.3 | length 3
  Bottom Layer w0.381: Q1.3 13.025,27.84 13.563,28.378 13.796,28.378 14.605,29.187 BP1.2
NetD1_1: D1.1 R4.2 | length 1.6
  Bottom Layer w0.381: R4.2 32.085,38.972 D1.1
NetLED1_1: LED1.1 R1.2 | length 3.2
  Bottom Layer w0.254: LED1.1 59.275,33.246 R1.2
NetLED2_1: LED2.1 R2.2 | length 2.8
  Bottom Layer w0.254: LED2.1 59.329,26.32 R2.2
NetLED3_1: LED3.1 R6.2 | length 2.6
  Bottom Layer w0.254: LED3.1 58.61,19.33 59.36,18.58 60.698,18.58 R6.2
NetLED4_1: LED4.1 R8.2 | length 2.6
  Bottom Layer w0.254: LED4.1 58.672,11.33 59.422,10.58 60.512,10.58 R8.2
NetP4_4: P4.4 Q2.3 | length 5.5
  Bottom Layer w0.254: Q2.3 16.666,22.164 17.755,23.253 P4.4
NetQ1_1: Q1.1 R3.2 R7.1 | length 3
  Bottom Layer w0.381: R3.2 13.843,22.604 R7.1@13.843,24.163 ; R7.1@13.88,24.101 13.88,25.457 Q1.1@13.916,25.494
NetQ2_1: Q2.1 R9.1 R10.1 | length 3.4
  Bottom Layer w0.254: R9.1 R9.1@13.028,18.847 ; R10.1 R9.1@13.028,18.847 ; Q2.1 13.057,18.819 R9.1@13.028,18.847 ; Q2.1@14.378,18.93 14.605,18.93 Q2.1@14.681,18.854
OSC32_IN: C18.1 U1.3 X1.2 | length 9.8
  Bottom Layer w0.254: C18.1 29.791,29.829 30.339,30.377 X1.2 30.887,30.13 30.887,29.315 32.245,27.957 33.693,27.957 34.515,27.135 U1.3
OSC32_OUT: C19.2 U1.4 X1.1 | length 8
  Bottom Layer w0.254: X1.1 33.037,29.99 34.153,29.99 34.228,29.916 C19.2 ; X1.1@32.901,29.547 32.601,29.547 32.452,29.398 32.452,28.857 32.931,28.378 33.811,28.378 35.015,27.174 U1.4
OSC_IN: C20.2 U1.5 Y1.1 | length 14.8
  Bottom Layer w0.254: U1.5 35.515,31.06 36.926,32.471 38.77,32.471 39.059,32.76 39.059,35.012 38.546,35.525 C20.2
OSC_OUT: C22.2 U1.6 Y1.3 | length 13.5
  Bottom Layer w0.254: U1.6 36.015,31.021 37.015,32.021 40.164,32.021 40.614,32.471 Y1.3 40.682,33.841 C22.2 C22.2@42.042,33.904
Relay_C_A: P2.3 U1.36 | length 45.6
  Top Layer w0.254: v1(39.828,16.471) 39.828,29.346 50.158,39.676 v1(64.793,39.676)
  Bottom Layer w0.254: U1.36 39.515,16.089 39.828,16.402 v1(39.828,16.471) ; v1(64.793,39.676) 65.866,39.676 P2.3
Relay_C_B: P2.1 U1.35 | length 48.1
  Top Layer w0.254: v1(40.478,16.074) 40.478,29.457 49.918,38.897 63.787,38.897 64.059,38.625 v1(67.255,38.625)
  Bottom Layer w0.254: U1.35 40.015,15.629 40.46,16.074 v1(40.478,16.074) ; v1(67.255,38.625) 67.912,38.625 68.42,39.133 P2.1
RS485_DIR: P1.3 U1.44 | length 53.5
  Top Layer w0.254: v1(4.87,37.47) 4.87,28.893 7.856,25.906 32.831,25.906 36.165,22.572 v1(36.165,17.362)
  Bottom Layer w0.254: P1.3 4.814,39.154 4.814,37.526 v1(4.87,37.47) ; U1.44 35.515,16.711 v1(36.165,17.362)
RS485_RX: P1.1 U1.30 | length 48.2
  Top Layer w0.254: v1(6.846,37.47) 6.846,36.22 7.296,35.77 8.283,35.77 v1(8.29,35.778)
  Bottom Layer w0.254: v1(6.846,37.47) P1.1 ; v1(8.29,35.778) 8.303,35.778 8.746,36.22 17.739,36.22 22.259,31.701 22.259,31.065 25.859,27.464 29.622,27.464 39.828,17.258 U1.30
RS485_TX: P1.5 U1.29 | length 51.7
  Bottom Layer w0.254: P1.5 1.766,38.016 3.18,36.601 18.009,36.601 22.64,31.97 22.64,31.223 26.017,27.845 29.78,27.845 39.867,17.758 U1.29
SWCLK: P3.2 R14.2 U1.49 | length 21
  Bottom Layer w0.254: U1.49 30.446,16.258 30.297,16.109 30.297,9.436 35.625,4.108 R14.2 39.218,4.075 P3.2@39.218,2.23
SWDIO: P3.3 R13.1 U1.46 | length 17.7
  Bottom Layer w0.254: U1.46 34.515,6.559 36.165,4.909 40.694,4.909 R13.1@41.59,4.013 ; R13.1 41.758,4.036 P3.3@41.758,2.23
VBAT: B1.1 C6.2 R4.1 U1.1 | length 29.6
  Bottom Layer w0.254: 25.365,36.772 24.661,36.068 23.185,36.068 23.443,35.81 23.443,34.466 22.917,33.941 22.917,32.314 23.021,32.21 23.021,31.381 26.148,28.253 29.911,28.253 32.406,25.758 U1.1
  Bottom Layer w0.305: C6.2 21.54,36.469 21.941,36.068 23.185,36.068 ; 25.365,36.772 25.365,38.972 B1.1 25.508,38.972 R4.1
VCC12: BP1.1 P2.2 R5.1 | length 62.6
  Top Layer w0.356: v3(16.896,38.938) 38.189,38.938 39.788,40.537 67.113,40.537 68.517,39.133 v3(68.517,36.211)
  Bottom Layer w0.356: BP1.1 v3(16.896,38.938) ; R5.1 56.457,40.101 v3(56.893,40.537) ; P2.2 68.517,34.159 v3(68.517,36.211)
VCC33: C1.2 C2.1 C3.2 C4.2 C7.2 C8.2 C9.2 C10.2 C11.2 C12.2 C14.2 C16.2 C17.2 C21.2 D1.2 P3.4 P4.10 P4.11 P6.2 Q2.2 R1.1 R2.1 R6.1 R8.1 R9.2 R12.2 R13.2 R16.1 R17.1 U1.13 U1.19 U1.32 U1.48 U1.64 U2.5 U3.8 | length 254.3
  Top Layer w0.381: 23.188,19.334 23.188,20.147 23.178,20.157 23.178,20.899 v3@27.182,24.903 ; v2(34.77,37.228) 35.545,38.003 v2(45.388,38.003)
  Top Layer w0.508: v2(17.093,17.87) 17.093,16.732 18.712,15.113 23.045,15.113 v2(27.43,10.728) 29.227,8.931 44.298,8.931 ; 23.136,15.022 23.136,17.209 23.162,17.235 23.162,19.308 ; v3(47.492,34.775) 41.323,28.605 v1(41.323,22.758) 41.323,14.376 44.298,11.401 44.298,8.931 ; v1(59.709,34.679) v1(59.709,29.457) v1(59.709,21.934) 59.709,19.839 59.842,19.706 v1(59.842,13.88) 59.842,13.371 60.43,12.784 60.43,10.58 58.246,8.396 50.111,8.396 48.057,6.342 48.057,2.498 47.73,2.171 44.357,2.171 44.298,2.23 44.298,8.931
  Bottom Layer w0.254: 17.828,19.753 P4.11 ; 18.136,20.261 P4.10@19.284,20.261 ; C10.2 30.086,25.615 31.042,24.659 31.042,23.781 31.306,23.781 31.329,23.758 U1.64 31.535,23.738 32.252,23.738 33.515,22.475 U1.48 32.782,14.258 31.939,13.415 C9.2 ; C17.2 C16.2 39.771,27.547 39.515,27.291 U1.13 39.515,23.415 40.172,22.758 v1(41.323,22.758) U1.19 46.368,22.758 47.033,23.423 C7.2 C11.2 ; U1.32 43.022,16.251 43.788,16.251 44.714,15.325 45.185,15.325 C8.2@45.374,15.136 ; P3.4@44.298,2.23 C12.2 44.298,5.577 C14.2 44.299,7.608 44.322,7.631 U3.8 46.72,7.631 C21.2 47.025,7.872 47.992,8.839 47.992,12.588 45.444,15.136 C8.2 ; v1(59.709,21.934) 60.747,20.895 R6.1 ; v1(59.709,29.457) 60.43,28.736 60.43,28.225 60.684,27.971 R2.1 ; v1(59.709,34.679) 59.927,34.897 R1.1 ; v1(59.842,13.88) 59.891,13.831 59.891,13.259 60.684,12.466 R8.1
  Bottom Layer w0.381: P6.2 9.665,9.289 9.665,3.383 C3.2 ; v2(17.093,17.87) 17.187,17.87 17.728,18.41 17.728,19.853 ; 17.828,19.753 17.728,19.853 ; 18.136,20.261 17.728,19.853 ; v3(27.214,24.903) 27.926,25.615 C10.2 ; v2(34.77,37.228) 34.771,37.23 34.771,39.118 D1.2 ; R13.2 41.776,5.669 44.209,5.669 C14.2 ; R16.1 R17.1 44.673,13.435 45.381,14.143 C8.2 ; R12.2@45.657,35.389 45.657,37.01 ; C4.2 45.657,40.17 45.348,39.861 45.348,38.044 v2(45.388,38.003) 45.509,37.882 45.509,37.157 45.657,37.01 ; R12.2 47.069,35.198 v3(47.492,34.775) ; U2.5 45.721,36.946 45.657,37.01
  Bottom Layer w0.508: P6.2 26.006,9.304 v2(27.43,10.728) ; R9.2 13.108,20.673 13.387,20.673 13.469,20.754 14.331,20.754 14.462,20.623 15.192,20.623 15.489,20.325 15.489,18.889 16.412,17.967 16.996,17.967 v2(17.093,17.87)
pads on no net: P1.4 P1.6 P4.1 P4.14 P4.15 P4.16 P8.1 P8.2 P8.3 P8.4 P8.5 P8.6 U1.2 U1.10 U1.11 U1.37 U1.38 U1.39 U1.40 U1.41 U1.42 U1.43 U2.3

## Polygon pours and split planes (outlines as drawn)
GND on Bottom Layer "GND_L02_P001" (solid, remove dead copper, pour order 1): -7.595,44.501 -6.121,45.974 81.966,45.974 81.966,-3.251 85.141,-6.426 82.906,-8.661 -1.981,-8.661 -1.981,2.184 -13.767,13.97 -7.468,20.269 -7.468,44.704
GND on Top Layer "GND_L01_P000" (solid, remove dead copper, pour order 0): -2.819,48.209 80.874,48.209 80.874,-7.747 79.654,-6.528 -9.195,-6.528 -9.195,41.834 -4.115,46.914

## Keep-outs
Keep-Out Layer:
  lines w0.254: -0.007,41.389 69.993,41.389 69.993,1 ; 0,41.382 0,1 69.986,1 ; 51.051,8.97 51.051,31.953 53.54,31.953 53.54,8.97 51.051,8.97

## Silkscreen, mask and mechanical layers (free items; w line width, h text height)
Top Overlay:
  lines w0.254: 2.5,3 2.5,38 67.5,38 67.5,3 2.5,3
  text "70mm" at 30.989,42.408 h2.03
  text "41mm" at 74.828,24.867 h2.03 r270
  text "35mm" at 72.1,23.52 h2.03 r270
  text "G  C  D  V" at 49.943,1.26 h2.29
  text "4P单相主板-V1" at 1.002,1.235 h2.29
  text "2026-01-12" at 19.548,1.213 h2.29
  text "65mm" at 30.531,-1.803 h1.52

## Text inside footprints (layer, text, board x,y; h text height)
B1: Bottom Overlay "+" at 25.898,38.404 h0.98 r270
P4: Bottom Overlay "XX" at 23.841,27.598 h0.6 r90; Bottom Overlay "A" at 23.869,16.254 h0.6 r90